# Altium PCB ITL230216.PcbDoc
Units mm, origin at the board's own origin, x right, y up, seen from the top; angles counter-clockwise.
Board outline 14 x 27.5 mm, 4 copper layers (Top Layer, Layer 2, Layer 3, Bottom Layer), stack 1.513 mm thick; 6 components, 16 nets, 64 pads, 14 vias.
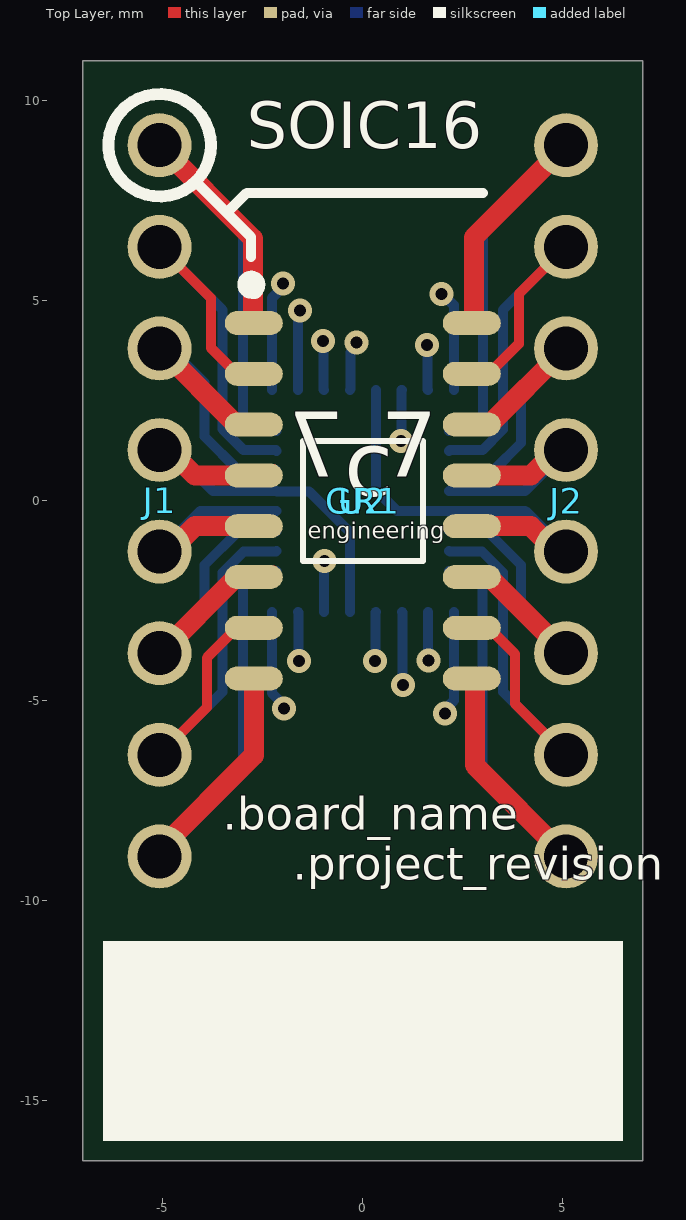
[diagram p0: Top Layer view]
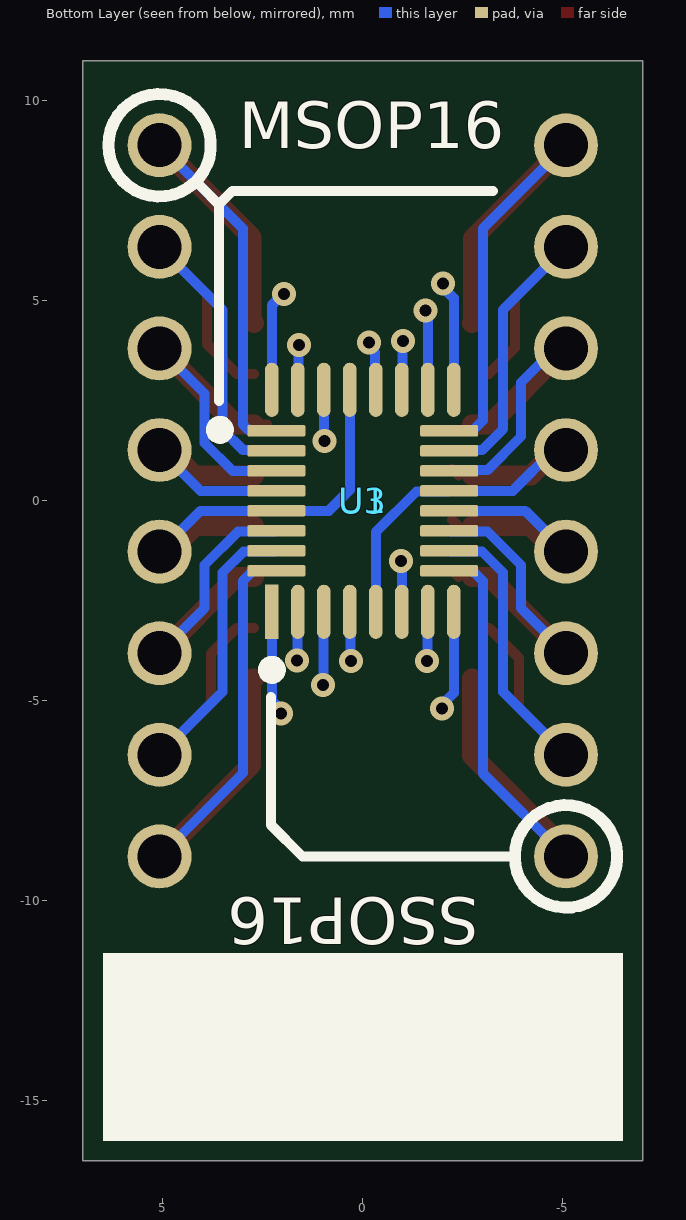
[diagram p1: Bottom Layer view, seen from below]
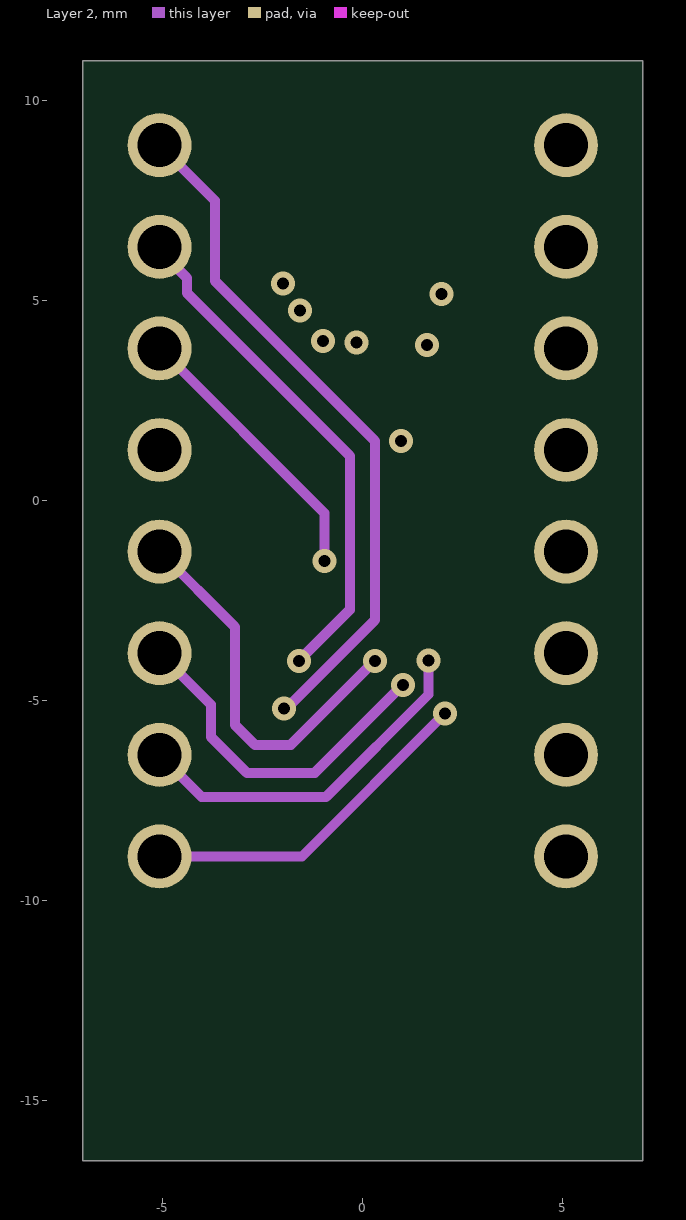
[diagram p2: Layer 2]
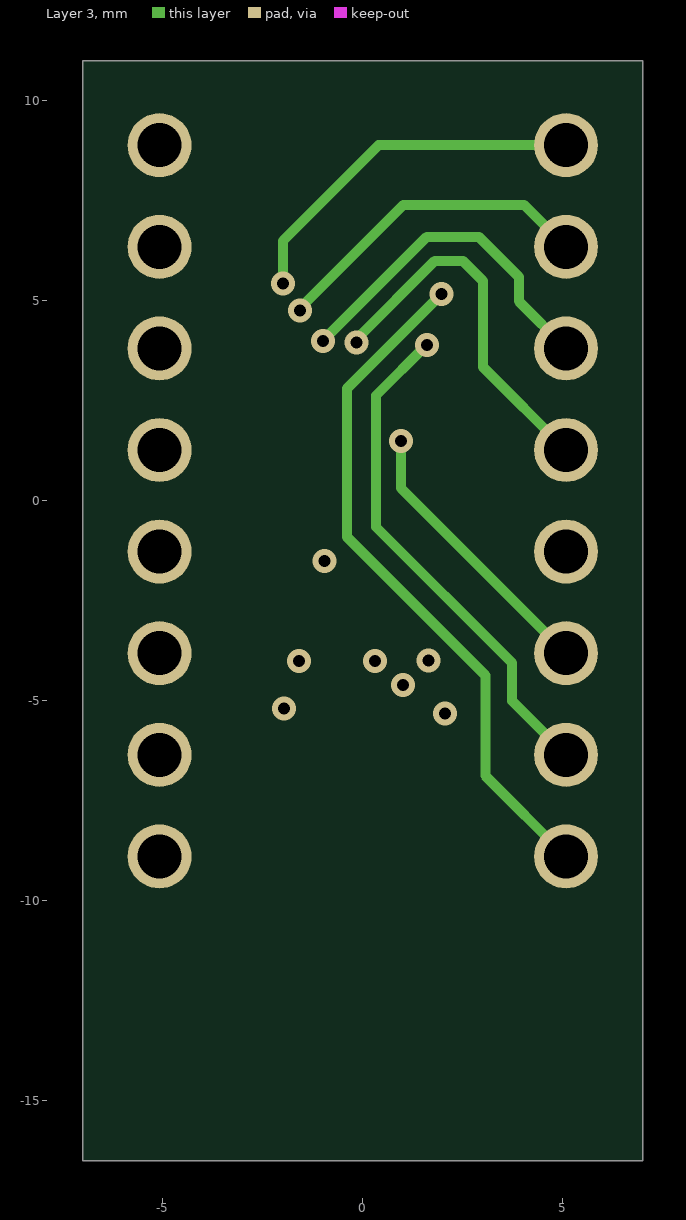
[diagram p3: Layer 3]
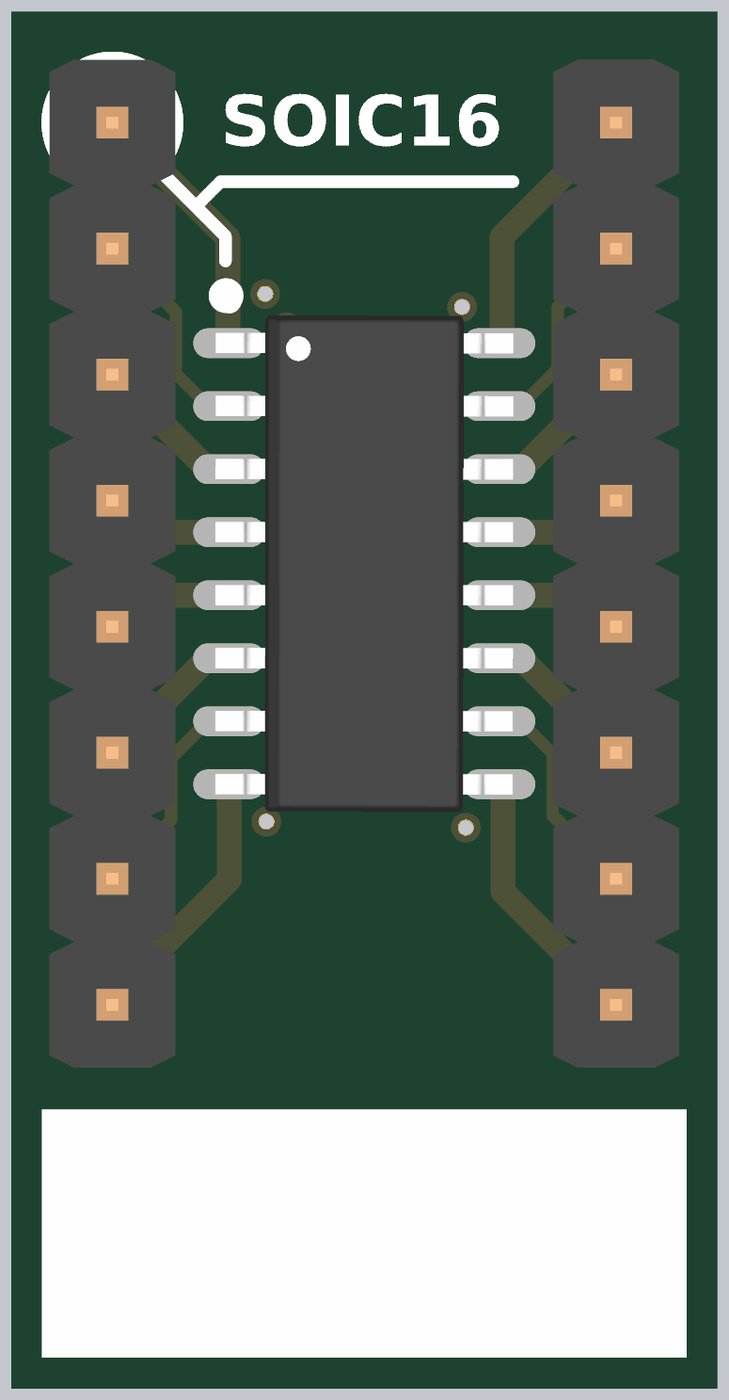
[diagram p4: 3D render of the assembled board from above, using the file's embedded part models]

## Layer stack, top to bottom
Top Solder: solder mask 0.0254, SM-001, Dk 4
Top Layer: signal copper 0.035
Dielectric 2: prepreg 0.2083, PP-022, Dk 4.5
Layer 2: signal copper 0.018
Dielectric 3: core 0.9906, Core-042, Dk 4.6
Layer 3: signal copper 0.018
Dielectric 5: prepreg 0.2083, PP-022, Dk 4.5
Bottom Layer: signal copper 0.035
Bottom Solder: solder mask 0.0254, SM-001, Dk 4

## Board outline
-7,-16.5 7,-16.5 7,11 -7,11

## Design rules (kind name [scope] priority, off if disabled: settings)
BoardOutlineClearance [IsElectrical or IsPoly] p1: gap=0.4 ignorepadtopadclearanceinfootprint=FALSE
Clearance Clearance_NTPH_to_Track [IsTrack vs IsPad and IsThruPin and not PadIsPlated] p1: gap=0.254 ignorepadtopadclearanceinfootprint=FALSE
Clearance Clearance_TH_Pad_to_TH_Pad [IsPad and IsThruPin vs IsPad and IsThruPin] p2: gap=0.5 ignorepadtopadclearanceinfootprint=FALSE
Clearance Clearance_SMT_Pad_to_SMT_Pad [IsPad and IsSMTPin vs IsPad and IsSMTPin] p3: gap=0.127 ignorepadtopadclearanceinfootprint=TRUE
Clearance [All] p4: gap=0.2 ignorepadtopadclearanceinfootprint=FALSE except(0.127: SMDPad-SMDPad)
HoleSize NPTH_HoleSize [IsPad And not PadIsPlated] p1: absolutevalues=TRUE maxlimit=2.7 minlimit=0.2 maxpercent=80.000 minpercent=20.000
HoleSize Pad_HoleSize [IsPad] p2: absolutevalues=TRUE maxlimit=2.7 minlimit=0.5 maxpercent=80.000 minpercent=20.000
HoleSize Via_HoleSize [IsVia] p3: absolutevalues=TRUE maxlimit=6.3 minlimit=0.2 maxpercent=80.000 minpercent=20.000
HoleToHoleClearance [All] p1: gap=0.254 allowstackedmicrovias=FALSE
MinimumAnnularRing [All] p1: minimumring=0.13
PolygonConnect [All] p1: thpad.connectstyle=Relief thpad.reliefconductorwidth=0.5 thpad.reliefentries=4 thpad.polygonreliefangle="90 Angle" thpad.airgapwidth=0.254 smdpad.connectstyle=Direct smdpad.reliefconductorwidth=0.5 smdpad.reliefentries=4 smdpad.polygonreliefangle="90 Angle" smdpad.airgapwidth=0.254 via.connectstyle=Direct via.reliefconductorwidth=0.5 via.reliefentries=4 via.polygonreliefangle="90 Angle" via.airgapwidth=0.254
RoutingVias [All] p1: holewidth=0.3 width=0.6 viastyle="Through Hole" minholewidth=0.2 minwidth=0.4 maxholewidth=0.711 maxwidth=1.27
SolderMaskExpansion SolderMaskExpansion_Via [IsVia] p1: expansion=0.102 istentingtop=TRUE
SolderMaskExpansion SolderMaskExpansion_notVia [not IsVia] p2: expansion=0.05 istentingtop=FALSE
Width [All] p1: maxlimit=2.54 minlimit=0.09 preferedwidth=0.25
28 further rules are at their usual default settings.

## Components (designator, comment, footprint, x,y, rotation, side; value= is the part's Value field where it differs from the comment)
GR1 "LOGO_7c7" LOGO_7c7_silk_3MM 0,0 r0 top
J1 "61300811121" 61300811121 -5.08,0 r270 top
J2 "61300811121" 61300811121 5.08,0 r270 top
U1 "16-pin-package" TSSOP16-0.65-4.4-L 0,0 r90 bottom
U2 "16-pin-package" SOP16-N 0,0 r0 top
U3 "16-pin-package" MSOP16 0,0 r180 bottom

## Footprints (in the part's own frame and the unit in brackets; to place one, negate y for a bottom-side part, rotate by r counter-clockwise, add the part's x,y. Pads: shape width x height; smd on the part's side, far side on the other; paste and mask are expansions set on the pad)
61300811121 [mm] "Pin Header, pitch 2.54 mm, THT, Vertical, single row, 8p"
  round 1.6 hole 1.1: 1(-8.89,0) 2(-6.35,0) 3(-3.81,0) 4(-1.27,0) 5(1.27,0) 6(3.81,0) 7(6.35,0) 8(8.89,0)
  body extent -10.16,-1.27 10.16,1.27, height 8.57
LOGO_7c7_silk_3MM [mm] "3mm x 3mm"
  silkscreen extent -1.5,-1.5 1.5,1.5
MSOP16 [mm]
  rrect25% 1.45x0.28 smd: 1(-2.16,1.75) 2(-2.16,1.25) 3(-2.16,0.75) 4(-2.16,0.25) 5(-2.16,-0.25) 6(-2.16,-0.75) 7(-2.16,-1.25) 8(-2.16,-1.75) 9(2.16,-1.75) 10(2.16,-1.25) 11(2.16,-0.75) 12(2.16,-0.25) 13(2.16,0.25) 14(2.16,0.75) 15(2.16,1.25) 16(2.16,1.75)
  silkscreen extent -3.53,1.68 -3.33,1.88, body extent -2.45,-2.02 2.45,2.02, height 1.11
SOP16-N [mm] "SOP, 16-Leads, Body 9.90x3.90mm, Pitch 1.27mm, IPC Medium Density"
  oval 1.45x0.6 smd: 1(-2.725,4.445) 2(-2.725,3.175) 3(-2.725,1.905) 4(-2.725,0.635) 5(-2.725,-0.635) 6(-2.725,-1.905) 7(-2.725,-3.175) 8(-2.725,-4.445) 9(2.725,-4.445) 10(2.725,-3.175) 11(2.725,-1.905) 12(2.725,-0.635) 13(2.725,0.635) 14(2.725,1.905) 15(2.725,3.175) 16(2.725,4.445)
  silkscreen extent -2.85,5.17 -2.6,5.42, body extent -3,-5 3,5, height 1.75
TSSOP16-0.65-4.4-L [mm] "TSSOP-16 pitch:0.65mm width:4.4mm IPC:Least (high density)"
  rect 1.355x0.341 smd: 1(-2.775,2.275)
  rrect100% 1.355x0.341 smd: 2(-2.775,1.625) 3(-2.775,0.975) 4(-2.775,0.325) 5(-2.775,-0.325) 6(-2.775,-0.975) 7(-2.775,-1.625) 8(-2.775,-2.275) 9(2.775,-2.275) 10(2.775,-1.625) 11(2.775,-0.975) 12(2.775,-0.325) 13(2.775,0.325) 14(2.775,0.975) 15(2.775,1.625) 16(2.775,2.275)
  silkscreen extent -4.35,2.15 -4.1,2.4, body extent -3.2,-2.5 3.2,2.5, height 1.2

## Part data
GR1: library part CMP-001-0005-7, "The 7c7 logo: Be proud of our designs and stamp that logo on there!"
J1 J2: library part CMP-045-000168-2, "WR-PHD Pin Header, THT, pitch 2.54mm, Single Row, Vertical, 8p", Contact resistance=20mOhm, Manufacturer="Wurth Elektronik", Operating Temperature="-40 to +105degC", Rated Current=3A, Withstanding Voltage=500VAC, Working Voltage=250VAC, Component Type=Standard, ComponentLink1Description=Manufacturer, ComponentLink1URL=http://www.we-online.de, ComponentLink2Description=Datasheet, ComponentLink2URL=https://www.we-online.com/catalog/datasheet/61300811121.pdf, Design Item ID=61300811121, Gender="Pin Header", Manufacturer Part Number=61300811121, Mounting Technology=THT, Orientation=Vertical, Packaging=Bag, Pin Count=8, Pin Number=8, Pitch=2.54mm, Row Number=Single, Source="WR-PHD_Pin Header.SchLib"
U1 U2 U3: library part CMP-002-001058-6, "package adapter"

## Via types
v1: diameter 0.6, hole 0.3, Top Layer to Bottom Layer, tented both sides, 14 vias

## Nets (pads, with @x,y where several pads share a name; then routed paths per layer and width w, separated by ;. In a path a pad name is that pad's centre, name@x,y a point inside that pad or via, vN(x,y) a via of type N, cw(c..) or ccw(c..) an arc to the next point about the centre after c; other vN are vias at no path point)
NetJ1_1: J1.1 U1.8 U2.1 U3.16 | length 34
  Top Layer w0.5: J1.1 -2.749,6.559 -2.749,4.469 U2.1
  Layer 2 w0.25: J1.1 -3.7,7.51 -3.7,5.5 0.3,1.5 0.3,-2.984 -1.914,-5.198 v1(-1.975,-5.198)
  Bottom Layer w0.25: J1.1 -3,6.81 -3,2.005 -2.745,1.75 U3.16 ; U1.8 -2.275,-4.803 -1.975,-5.103 v1(-1.975,-5.198)
NetJ1_2: J1.2 U1.7 U2.2 U3.15 | length 24.8
  Top Layer w0.25: J1.2 -3.8,5.07 -3.8,3.825 U2.2@-3.15,3.175
  Layer 2 w0.25: J1.2 -5.08,6.255 -4.4,5.575 -4.4,5.2 -0.325,1.125 -0.325,-2.725 v1(-1.6,-4)
  Bottom Layer w0.25: J1.2 -3.505,4.775 -3.505,1.791 -2.979,1.265 -2.175,1.265 U3.15 ; U1.7 -1.612,-2.788 -1.612,-3.988 v1(-1.6,-4)
NetJ1_3: J1.3 U1.6 U2.3 U3.14 | length 16.4
  Top Layer w0.5: J1.3 -5.068,3.81 -3.163,1.905 U2.3
  Layer 2 w0.25: J1.3@-5.074,3.81 -0.955,-0.309 v1(-0.955,-1.5)
  Bottom Layer w0.25: J1.3 -4.81,3.81 -3.955,2.955 -3.955,1.604 -3.116,0.765 -2.175,0.765 U3.14 ; U1.6 -0.975,-1.52 v1(-0.955,-1.5)
NetJ1_4: J1.4 U1.5 U2.4 U3.13 | length 10.4
  Top Layer w0.25: U2.4@-2.395,0.635 U2.4@-2.233,0.797
  Top Layer w0.5: J1.4 -4.835,1.27 -4.2,0.635 U2.4
  Bottom Layer w0.25: J1.4 -4.77,1.27 -3.75,0.25 U3.13 -2.145,0.235 -1.341,0.235 -0.325,-0.781 U1.5
NetJ1_5: J1.5 U1.4 U2.5 U3.12 | length 17.1
  Top Layer w0.25: U2.5@-2.395,-0.635 U2.5@-2.233,-0.473
  Top Layer w0.5: J1.5 -4.835,-1.27 -4.2,-0.635 U2.5
  Layer 2 w0.25: J1.5 -3.2,-3.15 -3.2,-5.6 -2.7,-6.1 -1.8,-6.1 v1(0.3,-4)
  Bottom Layer w0.25: J1.5 -4.06,-0.25 U3.12 ; v1(0.3,-4) 0.312,-3.988 0.312,-2.788 U1.4
NetJ1_6: J1.6 U1.3 U2.6 U3.11 | length 18.7
  Top Layer w0.25: U2.6@-2.395,-1.905 U2.6@-2.233,-1.743
  Top Layer w0.5: J1.6 -5.068,-3.81 -3.163,-1.905 U2.6
  Layer 2 w0.25: J1.6 -3.8,-5.09 -3.8,-5.9 -2.9,-6.8 -1.2,-6.8 v1(1,-4.6)
  Bottom Layer w0.25: J1.6 -3.955,-2.685 -3.955,-1.604 -3.116,-0.765 -2.175,-0.765 U3.11 ; U1.3 0.987,-2.788 0.987,-4.587 v1(1,-4.6)
NetJ1_7: J1.7 U1.2 U2.7 U3.10 | length 21
  Top Layer w0.25: J1.7 -3.9,-5.17 -3.9,-3.925 U2.7@-3.15,-3.175
  Layer 2 w0.25: J1.7 -4.03,-7.4 -0.916,-7.4 1.642,-4.842 v1(1.642,-3.991)
  Bottom Layer w0.25: J1.7 -3.505,-4.775 -3.505,-1.791 -2.979,-1.265 -2.175,-1.265 U3.10 ; U1.2 1.633,-2.784 1.633,-3.982 v1(1.642,-3.991)
NetJ1_8: J1.8 U1.1 U2.8 U3.9 | length 25.4
  Top Layer w0.5: J1.8 -5.08,-8.719 -2.725,-6.364 U2.8
  Layer 2 w0.25: J1.8 -1.522,-8.89 v1(2.049,-5.319)
  Bottom Layer w0.25: J1.8 -3,-6.81 -3,-2.005 -2.745,-1.75 U3.9 ; v1(2.049,-5.319) 2.049,-5.224 2.275,-4.998 U1.1
NetJ2_1: J2.1 U1.9 U2.16 U3.1 | length 26.1
  Top Layer w0.5: U2.16 2.771,4.491 2.779,4.491 2.779,6.589 J2.1
  Layer 3 w0.25: v1(-1.999,5.437) -1.999,6.501 0.39,8.89 J2.1
  Bottom Layer w0.25: U1.9 -2.275,5.066 -1.999,5.342 v1(-1.999,5.437) ; U3.1 2.175,1.765 2.854,1.765 3,1.911 3,6.81 J2.1
NetJ2_2: J2.2 U1.10 U2.15 U3.2 | length 21.4
  Top Layer w0.25: U2.15 3.15,3.175 3.9,3.925 3.9,5.17 J2.2
  Layer 3 w0.25: v1(-1.566,4.764) -1.566,4.817 1.016,7.4 4.03,7.4 J2.2
  Bottom Layer w0.25: U1.10 -1.625,4.706 v1(-1.566,4.764) ; U3.2 2.175,1.265 2.99,1.265 3.505,1.78 3.505,4.775 J2.2
NetJ2_3: J2.3 U1.11 U2.14 U3.3 | length 18.3
  Top Layer w0.25: U2.14@2.395,1.905 U2.14
  Top Layer w0.5: U2.14 3.162,1.905 5.067,3.81 J2.3
  Layer 3 w0.25: v1(-1,4) 1.6,6.6 2.9,6.6 3.9,5.6 3.9,4.99 J2.3
  Bottom Layer w0.25: v1(-1,4) -0.987,3.987 -0.987,2.788 U1.11 ; U3.3 3.26,0.75 3.955,1.445 3.955,2.685 J2.3
NetJ2_4: J2.4 U1.12 U2.13 U3.4 | length 16.6
  Top Layer w0.5: U2.13 4.2,0.635 4.835,1.27 J2.4
  Layer 3 w0.25: v1(-0.158,3.958) -0.158,4.042 1.8,6 2.5,6 3,5.5 3,3.35 J2.4
  Bottom Layer w0.25: U1.12 -0.308,2.793 -0.308,3.714 -0.158,3.863 v1(-0.158,3.958) ; U3.4 4.06,0.25 J2.4
NetJ2_5: J2.5 U1.13 U2.12 U3.5 | length 10.5
  Top Layer w0.5: U2.12 4.2,-0.635 4.835,-1.27 J2.5
  Bottom Layer w0.25: U1.13 0.325,0.275 0.85,-0.25 U3.5 4.06,-0.25 J2.5
NetJ2_6: J2.6 U1.14 U2.11 U3.6 | length 16.3
  Top Layer w0.5: U2.11 3.162,-1.905 5.067,-3.81 J2.6
  Layer 3 w0.25: v1(0.955,1.5) 0.955,0.315 J2.6
  Bottom Layer w0.25: v1(0.955,1.5) 0.965,1.51 0.965,2.765 U1.14 ; U3.6@2.145,-0.735 U3.6 2.175,-0.765 3.116,-0.765 3.955,-1.604 3.955,-2.685 J2.6
NetJ2_7: J2.7 U1.15 U2.10 U3.7 | length 25.1
  Top Layer w0.25: U2.10 3.15,-3.175 3.8,-3.825 3.8,-5.07 J2.7
  Layer 3 w0.25: v1(1.6,3.9) 0.33,2.63 0.33,-0.651 3.735,-4.056 3.735,-5.005 J2.7
  Bottom Layer w0.25: v1(1.6,3.9) 1.612,3.888 1.612,2.788 U1.15 ; U3.7 2.175,-1.265 2.979,-1.265 3.505,-1.791 3.505,-4.775 J2.7
NetJ2_8: J2.8 U1.16 U2.9 U3.8 | length 34
  Top Layer w0.5: U2.9 2.753,-4.445 2.799,-4.491 2.799,-6.609 J2.8
  Layer 3 w0.25: v1(1.973,5.175) -0.4,2.802 -0.4,-0.9 3.061,-4.361 3.061,-6.871 J2.8
  Bottom Layer w0.25: v1(1.973,5.175) 1.991,5.175 2.275,4.891 U1.16 ; U3.8 U3.8@2.26,-1.75 ; U3.8@2.275,-1.765 U3.8@2.26,-1.75 ; J2.8 2.995,-6.805 2.995,-2 2.745,-1.75 U3.8@2.26,-1.75

## Silkscreen, mask and mechanical layers (free items; w line width, h text height)
Top Overlay:
  circle w0.3: c-2.788,5.403 r0.2
  circle w0.3: c-5.08,8.89 r1.282
  rectangle: -6.5,-16 6.5,-11
  lines w0.25: -4.1,7.9 -2.8,6.6 -2.8,6.1 ; -3.4,7.2 -2.9,7.7 3,7.7
  text "SOIC16" at -2.9,8.43 h2
  text ".board_name" at -3.5,-8.5 h1.4
  text ".project_revision" at -1.75,-9.75 h1.4
Bottom Overlay:
  circle w0.3: c5.08,8.89 r1.282
  circle w0.3: c-5.08,-8.89 r1.282
  circle w0.3: c2.275,-4.225 r0.2
  circle w0.3: c3.575,1.775 r0.2
  rectangle: -6.5,-16 6.5,-11.3
  lines w0.25: -3.798,-8.89 1.51,-8.89 2.3,-8.1 2.3,-4.9 ; -3.25,7.75 3.26,7.75 3.6,7.41 ; 3.6,2.5 3.6,7.41 ; 4.045,7.855 3.6,7.41
  text "MSOP16" at 3.1,8.43 h2
  text "SSOP16" at -2.9,-9.53 h2 r180
Bottom Solder:
  rectangle: -2.5,-3.5 2.5,-2
  rectangle: -2.5,2 2.5,3.5
Board:
  the board outline again, w0.25

## Dimensions
-7,11 to -7,-16.5 on Dimensions
-7,11 to 7,11 on Dimensions

## Text inside footprints (layer, text, board x,y; h text height)
GR1: Top Overlay "7" at 0.452,0.059 h2.8; Top Overlay "c" at -0.463,-0.411 h2.8; Top Overlay "7" at -0.452,0.059 h2.8; Top Overlay "engineering" at -1.375,-1.088 h0.7